# Altium PCB PCB.PcbDoc
Units mil, origin at the board's own origin, x right, y up, seen from the top; angles counter-clockwise.
Board outline 2756 x 1968.5 mil, 2 copper layers (Top Layer, Bottom Layer), stack 57 mil thick; 36 components, 28 nets, 111 pads, 258 vias.
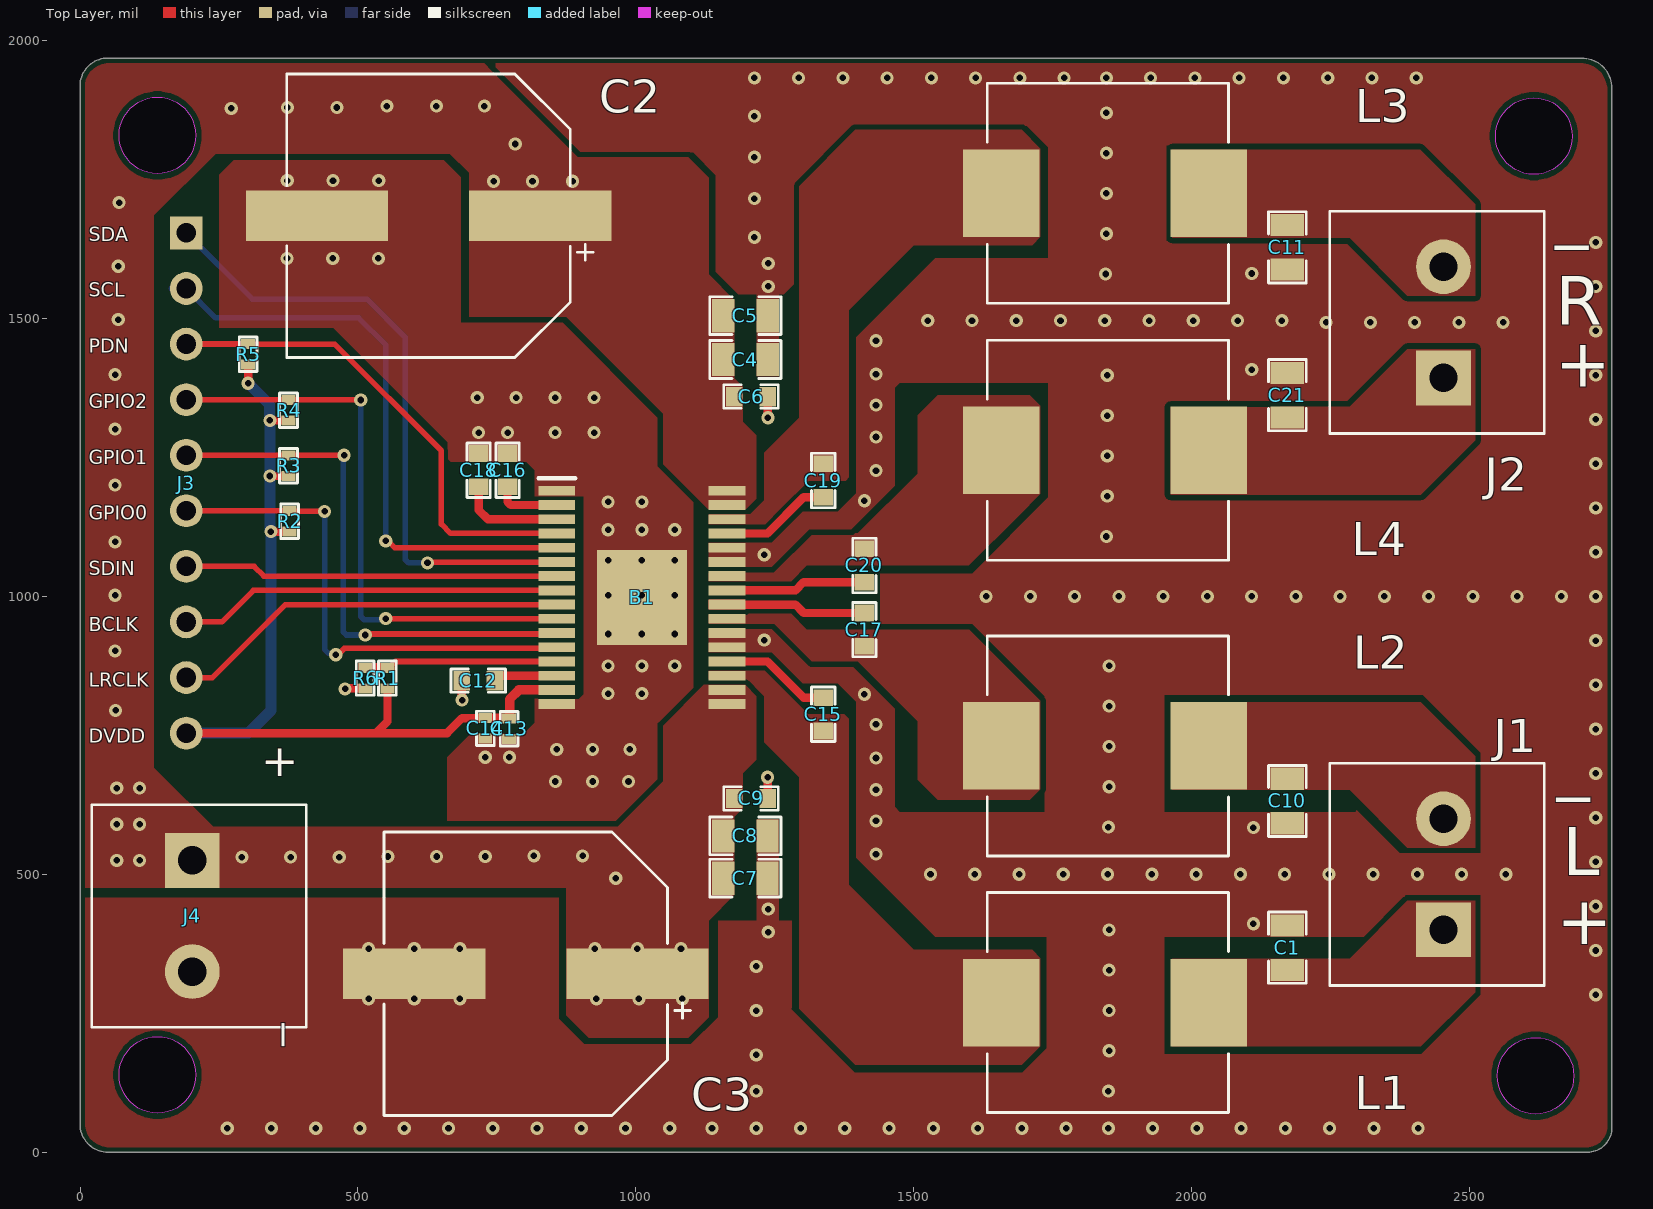
[diagram p0: Top Layer view]
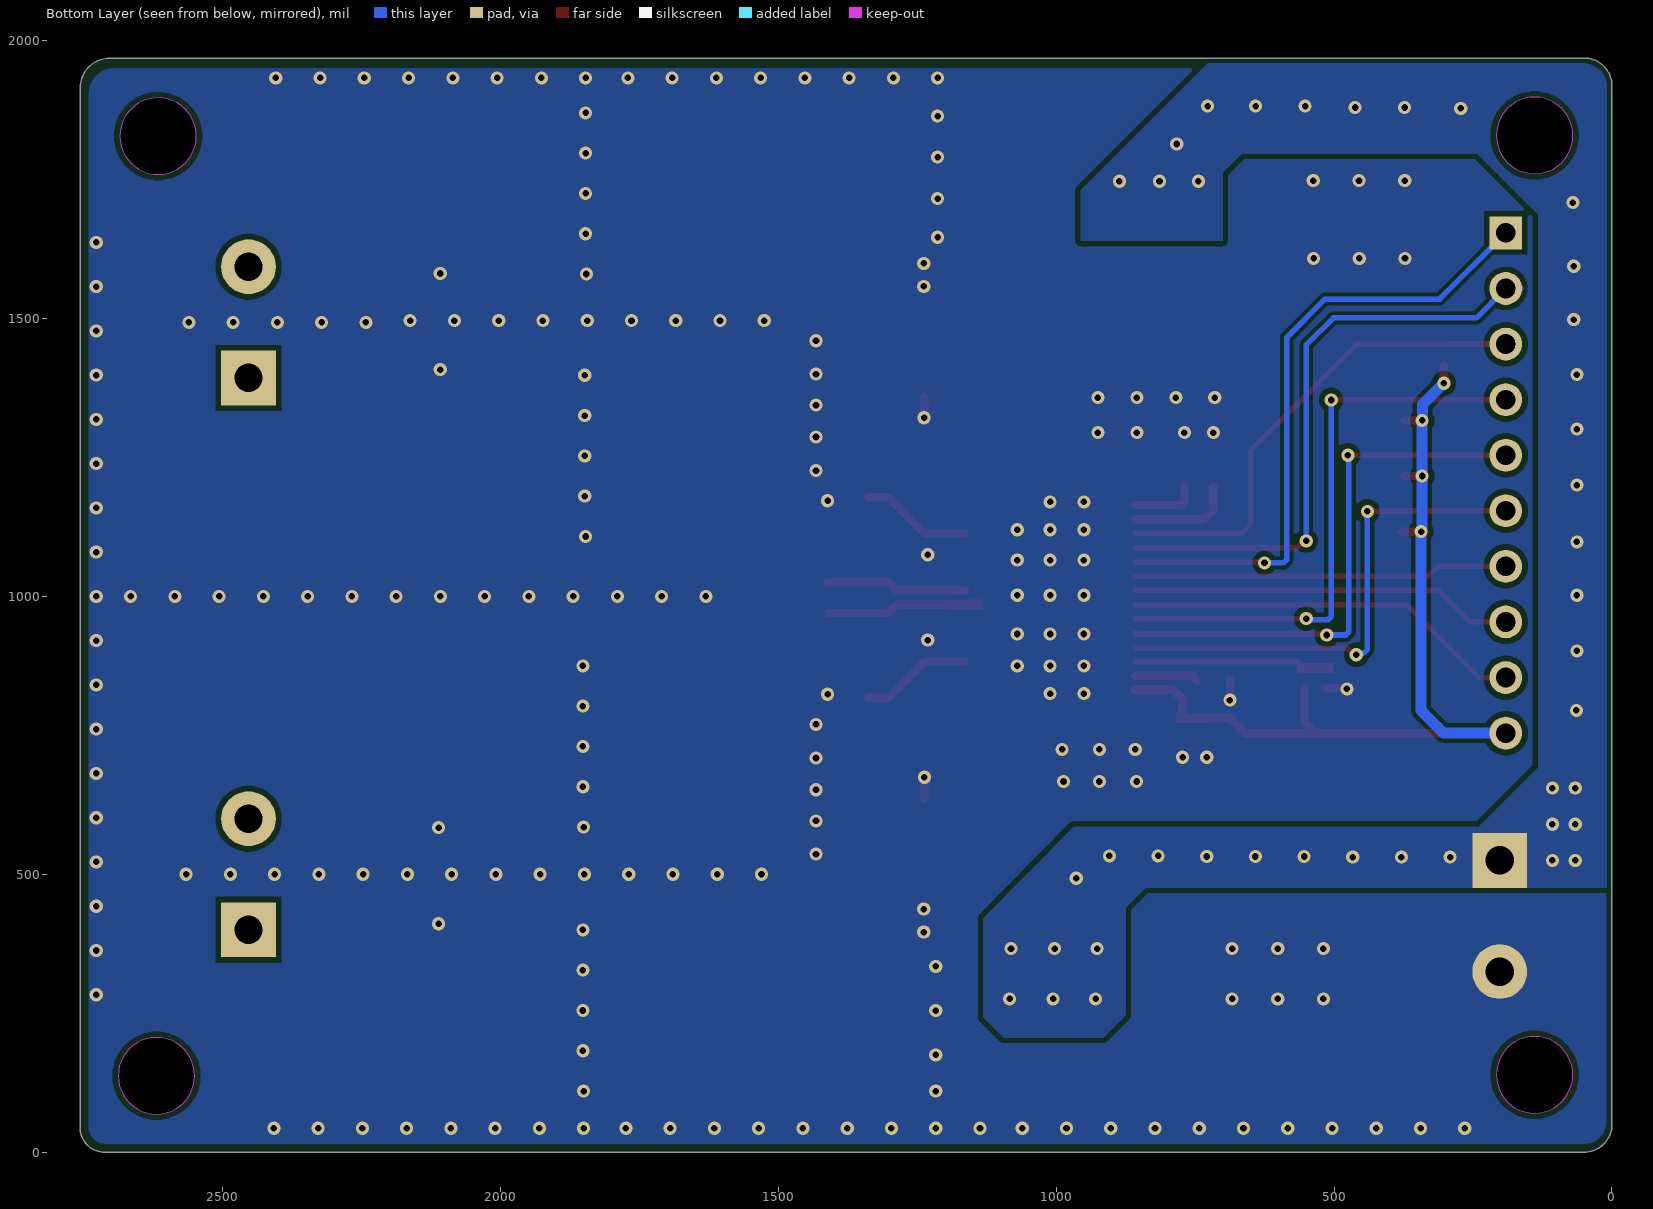
[diagram p1: Bottom Layer view, seen from below]
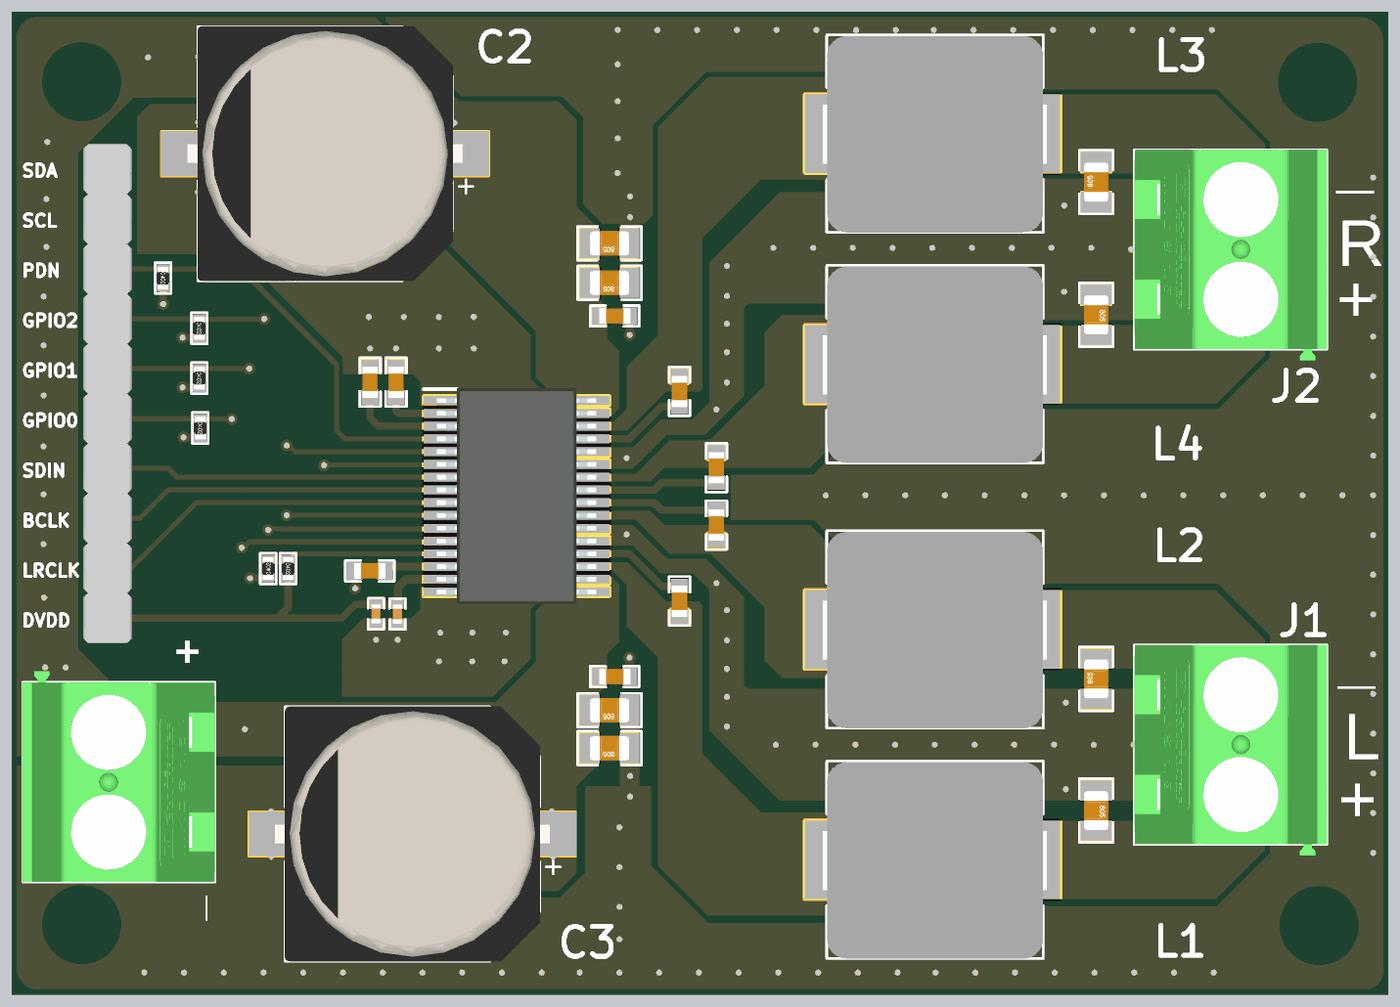
[diagram p2: 3D render of the assembled board from above, using the file's embedded part models]

## Layer stack, top to bottom
Top Solder: solder mask 3, Solder Resist, Dk 3.5
Top Layer: signal copper 10
Dielectric 1: core 37, FR-4, Dk 4.6
Bottom Layer: signal copper 10
Bottom Solder: solder mask 3, Solder Resist, Dk 3.5

## Board outline
50,0 cw(c50,50) 0,50 0,1918.5 cw(c50,1918.5) 50,1968.5 2702,1968.5 cw(c2702,1914.5) 2756,1914.5 2756,44 cw(c2712,44) 2712,0 2546,0
cut-out: 2546.73,1828.14 cw(c2615.63,1828.14) 2615.63,1897.03 cw(c2615.63,1828.14) 2684.53,1828.14 cw(c2615.63,1828.14) 2615.63,1759.24 cw(c2615.63,1828.14)
cut-out: 2549.66,137.44 cw(c2618.56,137.44) 2618.56,206.34 cw(c2618.56,137.44) 2687.46,137.44 cw(c2618.56,137.44) 2618.56,68.54 cw(c2618.56,137.44)
cut-out: 139.19,1760.41 cw(c139.19,1829.31) 70.3,1829.31 cw(c139.19,1829.31) 139.19,1898.21 cw(c139.19,1829.31) 208.09,1829.31 cw(c139.19,1829.31)
cut-out: 139.2,70.3 cw(c139.2,139.2) 70.3,139.2 cw(c139.2,139.2) 139.2,208.09 cw(c139.2,139.2) 208.09,139.2 cw(c139.2,139.2)

## Design rules (kind name [scope] priority, off if disabled: settings)
Clearance [All] p1: gap=10 ignorepadtopadclearanceinfootprint=FALSE except(5: Arc-SMDPad Arc-Text Arc-Hole Track-SMDPad Track-Text Track-Hole SMDPad-SMDPad SMDPad-Via SMDPad-Text SMDPad-Hole THPad-Text THPad-Hole Via-Text Fill-Text Poly-Text Region-Text Text-Text Text-Hole; 6: Arc-Arc Arc-Track Track-Track; 7: Arc-THPad Arc-Via Arc-Fill Arc-Poly Arc-Region Track-THPad Track-Via Track-Fill Track-Poly Track-Region SMDPad-Fill SMDPad-Poly SMDPad-Region)
HoleToHoleClearance [All] p1: gap=5 allowstackedmicrovias=TRUE
MinimumSolderMaskSliver [All] p1: minsoldermaskwidth=0
PlaneConnect [All] p1: planeconnectstyle=Direct reliefexpansion=20 reliefentries=4 reliefconductorwidth=10 reliefairgap=10
PolygonConnect [All] p1: connectstyle=Direct reliefconductorwidth=20 reliefentries=4 polygonreliefangle="90 Angle" airgapwidth=5
RoutingVias [All] p1: holewidth=11.81 width=23.62 viastyle="Through Hole" minholewidth=11.81 minwidth=23.62 maxholewidth=11.81 maxwidth=23.62
SilkToSilkClearance [All] p1: silktosilkclearance=0
SilkToSolderMaskClearance [IsPad] p1: minsilkscreentomaskgap=0 clearancetoexposedcopper=TRUE
SolderMaskExpansion [All] p1: expansion=4 istentingtop=FALSE
SupplyNets "Schematic Supply Nets_2" [InNet('DVDD')] p1: voltage=0.000
SupplyNets "Schematic Supply Nets_1" [InNet('PVDD')] p2: voltage=0.000
SupplyNets "Schematic Supply Nets" [InNet('GND')] p3: voltage=0.000
UnRoutedNet [All] p1: checkbadconnections=TRUE
Width [All] p1: maxlimit=50 minlimit=1 preferedwidth=10
24 further rules are at their usual default settings.

## Components (designator, comment, footprint, x,y, rotation, side; value= is the part's Value field where it differs from the comment)
B1 "TAS5828MDADR" SOP65P810X115-33M 1010.75,998.07 r0 top
C1 "680nF" Cap-0805 2172,368 r270 top
C2 "470uF" RVT470UF50V34RV0133 627,1685 r180 top
C3 "470uF" RVT470UF50V34RV0133 802,321 r180 top
C4 "10uF" Cap-0805 1197.01,1426.22 r180 top
C5 "10uF" Cap-0805 1197.01,1505.22 r180 top
C6 "100nF" Cap-0603 1207.23,1359.6 r180 top
C7 "10uF" Cap-0805 1197,493 r180 top
C8 "10uF" Cap-0805 1197,569 r180 top
C9 "100nF" Cap-0603 1207.23,636.42 r180 top
C10 "680nF" Cap-0805 2172,632 r90 top
C11 "680nF" Cap-0805 2172,1628 r90 top
C12 "1uF" Cap-0603 716.5,848.46 r0 top
C13 "0.1uF" Cap-0402 772,762 r90 top value=100nF
C14 "0.1uF" Cap-0402 729,762.5 r90 top value=100nF
C15 "0.47uF" Cap-0603 1337,787.83 r270 top
C16 "1uF" Cap-0603 769.09,1226.98 r270 top
C17 "0.47uF" Cap-0603 1411,940.22 r270 top
C18 "1uF" Cap-0603 717.09,1227 r270 top
C19 "0.47uF" Cap-0603 1337,1208.41 r90 top
C20 "0.47uF" Cap-0603 1411,1055.61 r90 top
C21 "680nF" Cap-0805 2172,1362 r270 top
J1 "1715721" 1715721 2453,500 r90 top
J2 "1715721" 1715721 2453,1493 r90 top
J3 "PZ254-1-10-Z-8.5" PZ254-1-10-Z-8.5 191,1654 r270 top
J4 "1715721" 1715721 202,425 r270 top
L1 "10uH" PSPMAA1040-100M-ANP 1843.98,269.22 r0 top
L2 "10uH" PSPMAA1040-100M-ANP 1843.98,731 r0 top
L3 "10uH" PSPMAA1040-100M-ANP 1843.98,1725.28 r0 top
L4 "10uH" PSPMAA1040-100M-ANP 1843.98,1263 r0 top
R1 "0R" Res-0402 553,853 r270 top
R2 "10K" Res-0402 377,1135 r270 top
R3 "10K" Res-0402 375,1235 r270 top
R4 "10K" Res-0402 375,1335 r270 top
R5 "10K" Res-0402 302.39,1435.64 r270 top
R6 "0R" Res-0402 513,853 r90 top

## Footprints (in the part's own frame and the unit in brackets; to place one, negate y for a bottom-side part, rotate by r counter-clockwise, add the part's x,y. Pads: shape width x height; smd on the part's side, far side on the other; paste and mask are expansions set on the pad)
1715721 [mm]
  rect 2.5x2.5 / inner round 2.5 / far side rect 2.5x2.5 hole 1.3: 1(-2.54,0)
  round 2.5 hole 1.3: 2(2.54,0)
  silkscreen extent -5.08,-4.6 5.08,5.2, body extent -5.64,-4.62 5.09,5.21, height 14.2
Cap-0402 [mil]
  rect 18x25 smd mask+2.36: 1(-18.5,0) 2(18.5,0)
  silkscreen extent -31,-16 31,16, body extent -20,-10 20,10, height 19
Cap-0603 [mil]
  rect 30x35 smd mask+2.36: 1(-30,0) 2(30,0)
  silkscreen extent -49,-21 49,21, body extent -32,-16 31,16, height 34
Cap-0805 [mil] "SMD 0805"
  rect 40x60 smd mask+2.76: 1(-40,0) 2(40,0)
  silkscreen extent -64,-34 64,34, body extent -39,-25 39,25, height 30
PSPMAA1040-100M-ANP [mm]
  rect 3.5x4 smd: 1(-4.75,0) 2(4.75,0)
  silkscreen extent -5.38,-5.03 5.64,5.03, body extent -5.57,-5.03 5.83,4.97, height 4
PZ254-1-10-Z-8.5 [mm]
  rect 1.5x1.5 hole 0.9: 1(0,0)
  round 1.5 hole 0.9: 2(2.54,0) 3(5.08,0) 4(7.62,0) 5(10.16,0) 6(12.7,0) 7(15.24,0) 8(17.78,0) 9(20.32,0) 10(22.86,0)
  body extent -1.27,-1.25 24.13,1.25, height 9.51
Res-0402 [mil]
  rect 18x25 smd mask+2.17: 1(-18.5,0) 2(18.5,0)
  silkscreen extent -32,-17 32,16, body extent -23,-11 23,11, height 16
RVT470UF50V34RV0133 [mm]
  rect 6.5x2.3 smd paste+0 mask+0.051: 1(-5.1,0) 2(5.1,0)
  silkscreen extent -7.52,-6.48 6.48,6.48, body extent -7,-6.5 7,6.5, height 13.5
SOP65P810X115-33M [mm]
  rect 1.675x0.45 smd: 1(-3.888,4.875) 2(-3.888,4.225) 3(-3.888,3.575) 4(-3.888,2.925) 5(-3.888,2.275) 6(-3.888,1.625) 7(-3.888,0.975) 8(-3.888,0.325) 9(-3.888,-0.325) 10(-3.888,-0.975) 11(-3.888,-1.625) 12(-3.888,-2.275) 13(-3.888,-2.925) 14(-3.888,-3.575) 15(-3.888,-4.225) 16(-3.888,-4.875) 17(3.888,-4.875) 18(3.888,-4.225) 19(3.888,-3.575) 20(3.888,-2.925) 21(3.888,-2.275) 22(3.888,-1.625) 23(3.888,-0.975) 24(3.888,-0.325) 25(3.888,0.325) 26(3.888,0.975) 27(3.888,1.625) 28(3.888,2.275) 29(3.888,2.925) 30(3.888,3.575) 31(3.888,4.225) 32(3.888,4.875)
  rect 4.11x4.36 smd: 33(0,0)
  silkscreen extent -4.72,5.45 -3.05,5.45, body extent -4.05,-5.5 4.05,5.5, height 1.15

## Part data
B1: "Audio Amplifiers 50-W stereo, digital input, high-performance, closed-loop, Class-D, with integrated audio processor 32-HTSSOP -40 to 85", LCSC Part Number=C5214953, Manufacturer_Name="Texas Instruments", Mouser Part Number=595-TAS5828MDADR, Datasheet Link=https://www.ti.com/lit/ds/symlink/tas5828m.pdf, Geometry.Height=1.15mm, Manufacturer_Part_Number=TAS5828MDADR, Mouser Price/Stock=https://www.mouser.co.uk/ProductDetail/Texas-Instruments/TAS5828MDADR?qs=doiCPypUmgHjYs2O7pGN6A%3D%3D
C1 C10 C11 C21: library part CC0805KKX7R9BB684, "50V 680nF X7R ±10% 0805 Multilayer Ceramic Capacitors MLCC - SMD/SMT ROHS", LCSC Part Number=C107133, Manufacturer=YAGEO, Package=0805, ComponentLink1Description="LCSC Link", ComponentLink1URL=https://www.lcsc.com/product-detail/Multilayer-Ceramic-Capacitors-MLCC-SMD-SMT_YAGEO-CC0805KKX7R9BB684_C107133.html, Item Type=Cap, Manufacturer Part Number=CC0805KKX7R9BB684
C2 C3: library part RVT470UF50V34RV0133, "470uF 50V 50mA@120Hz ±20% SMD,D12.5xL13.5mm Aluminum Electrolytic Capacitors - SMD ROHS", LCSC Part Number=C2837182, Manufacturer=KNSCHA, Item Type=Capacitor, Manufacturer Part Number=RVT470UF50V34RV0133, RoHS=No, Supplier=LCSC
C4 C5 C7 C8: library part GRM21BR61H106ME43L, "CAP CER 10UF 50V X5R 0805", LCSC Part Number=C2190942, Manufacturer=Murata, Supplier Part Number 1=490-18664-1-ND, Category="Ceramic Capacitors", Manufacturer Part Number=GRM21BR61H106ME43L, Pricing 1="1=0.44000, 10=0.30700, 50=0.21500, 100=0.18420, 500=0.13818, 1000=0.11668 (USD)", RoHS=Yes, Stock 1=26, Supplier 1=Digi-Key
C6 C9: library part CC0603KRX5R9BB104, "CAP CER 0.1UF 50V X5R 0603", Case Code (Imperial)=0603, Case Code (Metric)=1608, Dielectric=X5R, LCSC Part Number=C110022, Manufacturer=Yageo, Max Operating Temperature=85°C, Min Operating Temperature=-55°C, Package Quantity=4000, Supplier Part Number 1=311-4046-1-ND, Tolerance=10%, Voltage Rating=50V, Capacitance=100nF, Case/Package=0603, Category="Ceramic Capacitors", ComponentLink1Description=http://www.mouser.com/ds/2/447/Yageo_UPY-GP_NP0_16V-to-50V_9-358835.pdf?src-supplier=Mouser, ComponentLink1URL=http://www.mouser.com/ds/2/447/Yageo_UPY-GP_NP0_16V-to-50V_9-358835.pdf?src-supplier=Mouser, ComponentLink2Description=https://www.yageo.com/upload/media/product/productsearch/datasheet/mlcc/UPY-GPHC_X5R_4V-to-50V_26.pdf?src-supplier=Digi-Key, ComponentLink2URL=https://www.yageo.com/upload/media/product/productsearch/datasheet/mlcc/UPY-GPHC_X5R_4V-to-50V_26.pdf?src-supplier=Digi-Key, ComponentLink3Description=http://www.yageo.com/exep/pages/download/literatures/ProductSelectionGuide%202014_Final_2.pdf?src-supplier=Digi-Key, ComponentLink3URL=http://www.yageo.com/exep/pages/download/literatures/ProductSelectionGuide%202014_Final_2.pdf?src-supplier=Digi-Key, Halogen Free="Halogen Free", Item Type=Capacitor, Lead Free="Lead Free", Length=0.063inch, Manufacturer Part Number=CC0603KRX5R9BB104, Mount="Surface Mount", Packaging="Tape and Reel", Pricing 1="1=0.10000, 10=0.05200, 50=0.02820, 100=0.02310, 500=0.01648, 1000=0.01294 (USD)", RoHS=Yes, Stock 1=152253, Supplier 1=Digi-Key, Termination=SMD/SMT, Thickness=0.035inch, Voltage Rating (DC)=50V, Weight=7.1E-05oz, Width=0.031inch
C12 C16 C18: library part CC0603KRX5R8BB105, "CAP CER 1UF 25V X5R 0603", Case Code (Imperial)=0603, Case Code (Metric)=1608, Dielectric=X5R, LCSC Part Number=C14664, Manufacturer=Yageo, Max Operating Temperature=85°C, Min Operating Temperature=-55°C, Package Quantity=1, Supplier Part Number 1=311-1445-1-ND, Tolerance=10%, Voltage Rating=25V, Capacitance=1uF, Case/Package=0603, Category="Ceramic Capacitors", ComponentLink1Description=https://datasheet.ciiva.com/176/mlccorderingcode-176785.pdf?src-supplier=Digi-Key, ComponentLink1URL=https://datasheet.ciiva.com/176/mlccorderingcode-176785.pdf?src-supplier=Digi-Key, ComponentLink2Description=https://datasheet.ciiva.com/176/mlccorderingcode-176786.pdf?src-supplier=Digi-Key, ComponentLink2URL=https://datasheet.ciiva.com/176/mlccorderingcode-176786.pdf?src-supplier=Digi-Key, ComponentLink3Description=https://datasheet.ciiva.com/176/mlccorderingcode-176787.pdf?src-supplier=Digi-Key, ComponentLink3URL=https://datasheet.ciiva.com/176/mlccorderingcode-176787.pdf?src-supplier=Digi-Key, ComponentLink4Description=https://datasheet.ciiva.com/17436/upy-gphc-x5r-4v-to-50v-12-17436952.pdf?src-supplier=Avnet+Europe, ComponentLink4URL=https://datasheet.ciiva.com/17436/upy-gphc-x5r-4v-to-50v-12-17436952.pdf?src-supplier=Avnet+Europe, ComponentLink5Description=https://datasheet.ciiva.com/7978/1525783-7978171.pdf?src-supplier=Element14, ComponentLink5URL=https://datasheet.ciiva.com/7978/1525783-7978171.pdf?src-supplier=Element14, ComponentLink6Description=https://datasheet.ciiva.com/11586/upy-gphc-x5r-4v-to-50v-12-11586318.pdf?src-supplier=Avnet, ComponentLink6URL=https://datasheet.ciiva.com/11586/upy-gphc-x5r-4v-to-50v-12-11586318.pdf?src-supplier=Avnet, Construction=Flat, Depth=0.8mm, Halogen Free="Halogen Free", Height=0.8mm, Item Type=Capacitor, Lead Free="Lead Free", Length=1.6mm, Manufacturer Part Number=CC0603KRX5R8BB105, Mount="Surface Mount", Number of Pins=2, Packaging="Tape and Reel", Pricing 1="1=0.12000, 10=0.08400, 50=0.04760, 100=0.03940, 500=0.02764, 1000=0.02288 (USD)", Radiation Hardening=No, REACH SVHC="No SVHC", RoHS=Yes, RoHS Compliant=Yes, Series=CC, Stock 1=919939, Supplier 1=Digi-Key, Termination=SMD/SMT, Thickness=0.035inch, Voltage Rating (DC)=25V, Width=0.031inch
C13 C14: library part CC0402JRX7R7BB104, "CAP CER 0.1UF 16V X7R 0402", Case Code (Imperial)=0402, Case Code (Metric)=1005, Dielectric=X7R, LCSC Part Number=C541464, Manufacturer=Yageo, Max Operating Temperature=125°C, Min Operating Temperature=-55°C, Package Quantity=10000, Supplier Part Number=311-1676-1-ND, Tolerance=5%, Voltage Rating=16V, Case/Package=0402, Category="Ceramic Capacitors", ComponentLink1Description=https://datasheet.ciiva.com/13210/upy-gphc-x7r-6-3v-to-50v-8-12304-13210152.pdf?src-supplier=Mouser, ComponentLink1URL=https://datasheet.ciiva.com/13210/upy-gphc-x7r-6-3v-to-50v-8-12304-13210152.pdf?src-supplier=Mouser, Construction=Flat, Halogen Free="Halogen Free", Height=0.5mm, Item Type=Capacitor, Lead Free="Lead Free", Length=0.039inch, Manufacturer Part Number=CC0402JRX7R7BB104, Material=4241ConductorMaterial, Mounting Technology="Surface Mount", Packaging="Tape and Reel", Pricing="1=0.1, 10=0.046, 50=0.0262, 100=0.0203, 500=0.01528, 1000=0.012, 2500=0.01091, 5000=0.01004 (USD)", RoHS=Yes, RoHS Compliant=Yes, Series=CC, Stock=1659111, Supplier=Digikey, Thickness=0.022inch, Voltage Rating (DC)=16V, Width=0.02inch
C15 C17 C19 C20: library part CC0603KRX5R9BB474, "CAP CER 0.47UF 50V X5R 0603", Capacitance=470nF, Case/Package=0603, Dielectric=X5R, LCSC Part Number=C513651, Manufacturer=Yageo, Max Operating Temperature=85°C, Min Operating Temperature=-55°C, Supplier Part Number 1=311-4047-1-ND, Tolerance=10%, Voltage Rating=50V, Category="Ceramic Capacitors", ComponentLink1Description="https://www.mouser.com/ds/2/447/ProductSelectionGuide 2014_Final_2-1131690.pdf?src-supplier=Mouser", ComponentLink1URL="https://www.mouser.com/ds/2/447/ProductSelectionGuide 2014_Final_2-1131690.pdf?src-supplier=Mouser", ComponentLink2Description=http://www.yageo.com/documents/recent/UPY-GPHC_X5R_4V-to-50V_25.pdf?src-supplier=Digi-Key, ComponentLink2URL=http://www.yageo.com/documents/recent/UPY-GPHC_X5R_4V-to-50V_25.pdf?src-supplier=Digi-Key, ComponentLink3Description=http://www.yageo.com/exep/pages/download/literatures/ProductSelectionGuide%202014_Final_2.pdf?src-supplier=Digi-Key, ComponentLink3URL=http://www.yageo.com/exep/pages/download/literatures/ProductSelectionGuide%202014_Final_2.pdf?src-supplier=Digi-Key, Halogen Free="Halogen Free", Item Type=Capacitor, Lead Free="Lead Free", Length=0.063inch, Manufacturer Part Number=CC0603KRX5R9BB474, Mount="Surface Mount", Packaging="Tape and Reel", Pricing 1="1=0.45000, 10=0.31400, 50=0.22000, 100=0.18860, 500=0.14144, 1000=0.11944 (USD)", RoHS=Yes, RoHS Compliant=Yes, Stock 1=15145, Supplier 1=Digi-Key, Thickness=0.035inch, Voltage Rating (DC)=50V, Width=0.031inch
J1 J2 J4: "TERM BLK 2P SIDE ENT 5.08MM PCB", LCSC Part Number=C480516, Manufacturer="Phoenix Contact", Supplier Part Number=277-1263-ND, ComponentLink1Description=https://datasheet.ciiva.com/1120/1697161-1120393.pdf?src-supplier=Farnell, ComponentLink1URL=https://datasheet.ciiva.com/1120/1697161-1120393.pdf?src-supplier=Farnell, ComponentLink2Description=https://datasheet.ciiva.com/832/1715721-832095.pdf?src-supplier=Digikey, ComponentLink2URL=https://datasheet.ciiva.com/832/1715721-832095.pdf?src-supplier=Digikey, ComponentLink3Description=https://datasheet.ciiva.com/15169/getdatasheetpartid-212174-15169929.pdf?src-supplier=Verical, ComponentLink3URL=https://datasheet.ciiva.com/15169/getdatasheetpartid-212174-15169929.pdf?src-supplier=Verical, ComponentLink4Description=https://datasheet.ciiva.com/16046/1715721-16046034.pdf?src-supplier=Onlinecomponents.com, ComponentLink4URL=https://datasheet.ciiva.com/16046/1715721-16046034.pdf?src-supplier=Onlinecomponents.com, Item Type="Terminal Blocks", Manufacturer Part Number=1715721, Pricing="1=0.94 (USD)", RoHS=Yes, Stock=13160, Supplier=Digikey
J3: "3A Direct Insert Policy 2.5mm 260℃@10S 10P 6mm -40℃~+105℃ 3mm 2.54mm Single Row Black Brass 1x10P Plugin,P=2.54mm Pin Headers ROHS", LCSC Part Number=C2894933, Manufacturer=HCTL, Package=Plugin,P=2.54mmPlugin,P=2.54mm, ComponentLink1Description="LCSC Link", ComponentLink1URL=https://www.lcsc.com/product-detail/Pin-Headers_HCTL-PZ254-1-10-Z-8-5_C2894933.html, Item Type=Header, Manufacturer Part Number=PZ254-1-10-Z-8.5
L1 L2 L3 L4: library part PSPMAA1040-100M-ANP, "7A 10uH ±20% 10A SMD,10.3x10.5mm Power Inductors ROHS", LCSC Part Number=C2983105, Manufacturer="PROD Tech", Package=SMD,10.3x10.5mm, ComponentLink1Description=LCSC, ComponentLink1URL=https://www.lcsc.com/product-detail/Power-Inductors_PROD-Tech-PSPMAA1040-100M-ANP_C2983105.html, Item Type=Inductor, Manufacturer Part Number=PSPMAA1040-100M-ANP
R1 R6: library part RC0402FR-070RL, "RES 0 OHM JUMPER 1/16W 0402", Case Code (Imperial)=0402, Case Code (Metric)=1005, LCSC Part Number=C106231, Manufacturer=Yageo, Max Operating Temperature=155°C, Max Power Dissipation=63mW, Min Operating Temperature=-55°C, Power Rating=62.5mW, Resistor Type="Thick Film", Supplier Part Number 1=603-RC0402FR-070RL, Temperature Coefficient=200ppm/°C, Tolerance=1%, Voltage Rating=50V, Case/Package=0402, ComponentLink1Description=https://datasheet.ciiva.com/8896/pyu-rc0402-51-rohs-l-6-8896149.pdf?src-supplier=Avnet, ComponentLink1URL=https://datasheet.ciiva.com/8896/pyu-rc0402-51-rohs-l-6-8896149.pdf?src-supplier=Avnet, ComponentLink2Description=https://datasheet.ciiva.com/16790/pyu-rc0402-51-rohs-l-6-r-16790444.pdf?src-supplier=Future+Electronics, ComponentLink2URL=https://datasheet.ciiva.com/16790/pyu-rc0402-51-rohs-l-6-r-16790444.pdf?src-supplier=Future+Electronics, Contact Plating=Tin,Matte, Features="Moisture Resistant", Height=0.35mm, Item Type=Resistors, Lead Free="Lead Free", Length=1mm, Manufacturer Part Number=RC0402FR-070RL, Mount="Surface Mount", Number of Terminations=2, Packaging="Tape and Reel", Pricing 1="1=0.10000, 10=0.01400, 50=0.01400, 100=0.00600, 1000=0.00300, 5000=0.00200, 10000=0.00100 (USD)", Radiation Hardening=No, Resistance=0R, RoHS=Yes, RoHS Compliant=Yes, Series=RC, Size Code=0402, Stock 1=8556842, Supplier 1=Mouser, Termination=SMD/SMT, Width=0.5mm
R2 R3 R4 R5: library part RC0402FR-0710KL, "RES 10K OHM 1% 1/16W 0402", Case Code (Imperial)=0402, Case Code (Metric)=1005, LCSC Part Number=C60490, Manufacturer=Yageo, Max Operating Temperature=155°C, Max Power Dissipation=63mW, Min Operating Temperature=-55°C, Power Rating=62.5mW, Resistance=10kR, Resistance Tolerance=1%, Resistor Type="Thick Film", Supplier Part Number 1=603-RC0402FR-0710KL, Temperature Coefficient=100ppm/°C, Voltage Rating=50V, Case/Package=0402, Category="Chip SMD Resistors", ComponentLink1Description=https://datasheet.ciiva.com/7660/38568-7660787.pdf?src-supplier=Element14, ComponentLink1URL=https://datasheet.ciiva.com/7660/38568-7660787.pdf?src-supplier=Element14, ComponentLink2Description=https://datasheet.ciiva.com/7849/1686128-7849814.pdf?src-supplier=Element14, ComponentLink2URL=https://datasheet.ciiva.com/7849/1686128-7849814.pdf?src-supplier=Element14, ComponentLink3Description=https://datasheet.ciiva.com/7983/1018594-7983486.pdf?src-supplier=Element14, ComponentLink3URL=https://datasheet.ciiva.com/7983/1018594-7983486.pdf?src-supplier=Element14, ComponentLink4Description=https://datasheet.ciiva.com/22747/1018594-22747512.pdf?src-supplier=Element14, ComponentLink4URL=https://datasheet.ciiva.com/22747/1018594-22747512.pdf?src-supplier=Element14, ComponentLink5Description=https://datasheet.ciiva.com/12667/pyu-rc0402-51-rohs-l-6-r-12667067.pdf?src-supplier=Mouser, ComponentLink5URL=https://datasheet.ciiva.com/12667/pyu-rc0402-51-rohs-l-6-r-12667067.pdf?src-supplier=Mouser, ComponentLink6Description=https://datasheet.ciiva.com/7849/1784430-7849813.pdf?src-supplier=Element14, ComponentLink6URL=https://datasheet.ciiva.com/7849/1784430-7849813.pdf?src-supplier=Element14, ComponentLink7Description=https://datasheet.ciiva.com/7849/1784430-7849815.pdf?src-supplier=Element14, ComponentLink7URL=https://datasheet.ciiva.com/7849/1784430-7849815.pdf?src-supplier=Element14, Construction=Rectangular, Depth=0.5mm, Features="Moisture Resistant", Height=0.32mm, Item Type=Resistor, Lead Free="Lead Free", Lead Pitch=0.2mm, Length=1mm, Manufacturer Part Number=RC0402FR-0710KL, Military Standard=Not, Number of Pins=2, Number of Terminations=2, Packaging="Tape and Reel", Pricing 1="1=0.10000, 10=0.01400, 50=0.01400, 100=0.00500, 1000=0.00300, 10000=0.00200 (USD)", REACH SVHC="No SVHC", RoHS=Yes, RoHS Compliant=Yes, Series=RC, Stock 1=18648329, Supplier 1=Mouser, Termination=SMD/SMT, Tolerance=1%, Voltage Rating (DC)=50V, Width=0.5mm, Working Voltage=50V

## Via types
v1: diameter 23.62, hole 11.81, Top Layer to Bottom Layer, 258 vias

## Nets (pads, with @x,y where several pads share a name; then routed paths per layer and width w, separated by ;. In a path a pad name is that pad's centre, name@x,y a point inside that pad or via, vN(x,y) a via of type N, cw(c..) or ccw(c..) an arc to the next point about the centre after c; other vN are vias at no path point)
ADR: B1.13 R1.1 R6.2 | length 309.4
  Top Layer w10: R1.1 556.5,871.5 567.91,882.91 B1.13
BCLK: B1.8 J3.8 | length 690.2
  Top Layer w10: J3.8 255,954 311.87,1010.87 B1.8
BST_A+: B1.20 C15.1 | length 200.2
  Top Layer w15: B1.20 1236.66,882.91 1301.84,817.73 C15.1@1337,817.73
BST_A-: B1.24 C17.1 | length 253.4
  Top Layer w15: B1.24 1286.94,985.28 1302,970.22 C17.1
BST_B+: B1.29 C19.1 | length 200.2
  Top Layer w15: B1.29 1236.66,1113.23 1301.84,1178.41 C19.1
BST_B-: B1.25 C20.1 | length 253.3
  Top Layer w15: B1.25 1287.1,1010.87 1301.84,1025.61 C20.1
DVDD: B1.15 C13.2 C14.2 J3.10 R1.2 R2.2 R3.2 R4.2 R5.2 | length 1674.6
  Top Layer w15: J3.10 532,754 ; v1@302.35,1383.56 R5.2 ; v1@341.42,1216.54 R3.2 ; v1@341.42,1316.54 R4.2 ; v1@343.42,1116.54 R2.2 ; R1.2 553,775 532,754 ; C14.2 687.49,781 660.49,754 532,754
  Top Layer w17: C13.2 772.32,780.5 772.82,781 772.82,815 789.55,831.73 B1.15
  Bottom Layer w20: J3.10 303,754 343.38,794.38 v1(343.38,1116.57) 343.38,1117.55 341.38,1119.55 v1(341.38,1216.57) v1(341.38,1316.57) 340.69,1317.26 340.69,1345.15 v1(302.32,1383.53)
GND: B1.1 B1.16 B1.21 B1.22 B1.27 B1.28 B1.33 C1.1 C2.2 C3.2 C4.1 C5.1 C6.1 C7.1 C8.1 C9.1 C10.1 C11.1 C12.1 C13.1 C14.1 C16.1 C18.1 C21.1 J4.2 R6.1 | length 147.2
  Top Layer w15: v1@477.63,834.5 R6.1 ; v1@686.51,814.27 C12.1@686.51,849.64 ; v1(1237,674.57) 1237.12,674.46 1237.12,636.54 C9.1 ; C6.1 1237.35,1359.48 1237.35,1321.57 v1(1237.46,1321.45)
  other v1: 264.65,43 344.28,43 423.91,43 503.54,43 583.17,43 662.8,43 742.43,43 822.06,43 901.69,43 981.32,43 1060.96,43 1136.96,43 1216.59,43 1296.22,43 1375.85,43 1455.48,43 1535.11,43 1614.74,43 1694.37,43 1774,43 1850,43 1929.63,43 2009.26,43 2088.89,43 2168.52,43 2248.15,43 2327.78,43 2407.41,43 1216.59,110 1850,110 1216.59,175 1851.48,182.5 1216.59,254.63 1851.48,255 519,275.72 601.22,275.72 683.44,275.72 2727,283.32 1851.48,327.5 1216.59,334.26 2727,362.96 519,366.28 601.22,366.28 683.44,366.28 1238,396 1851.48,400 2111,411 1238,437.5 2727,442.59 1530.07,500 1609.7,500 1689.33,500 1768.96,500 1848.59,500 1928.22,500 2007.85,500 2087.49,500 2167.12,500 2246.75,500 2326.38,500 2406.01,500 2485.64,500 2565.27,500 2727,522.22 1432,536.29 2111,584 1850,585 1432,596.14 2727,601.85 1432,652.07 1851.48,657.5 855.13,667 922.18,667 986.68,667 2727,681.48 1432,709.3 729,710.49 772.32,710.49 857.68,724.75 922.18,724.75 989.22,724.75 1851.48,730 2727,761.11 1432,769.73 1851.48,802.5 687.32,813.46 1411,824 950,825 1010.75,825 476.82,833.68 2727,840.74 950,875 1010.75,875 1070,875 1851.48,875 2727,920.37 1231,921.3 950,932.33 1010.75,932.33 1070,932.33 1630,1000 1709.63,1000 1789.26,1000 1868.89,1000 1948.52,1000 2028.15,1000 2107.78,1000 2187.41,1000 2267.04,1000 2346.68,1000 2426.31,1000 2505.94,1000 2585.57,1000 2665.2,1000 2727,1000 950,1002.01 1010.75,1002.01 1070,1002.01 950,1065.21 1010.75,1065.21 1070,1065.21 1231,1074.84 2727,1079.63 1846.48,1107.8 950,1120 1010.75,1120 1070,1120 2727,1159.26 950,1170 1010.75,1170 1411,1172.14 1847.97,1180.3 1432,1226.41 2727,1238.89 1847.97,1252.8 1432,1286.84 717.09,1294.67 769.09,1294.67 854.65,1294.67 924.72,1294.67 2727,1318.52 1847.97,1325.3 1432,1344.07 714.5,1357.73 784.57,1357.73 854.65,1357.73 924.72,1357.73 1847.97,1397.8 2727,1398.15 1432,1400 2108,1408 1432,1459.85 2727,1477.78 2241.75,1493 2321.38,1493 2401.01,1493 2480.64,1493 2560.27,1493 1525.07,1496.14 1604.7,1496.14 1684.33,1496.14 1763.96,1496.14 1843.59,1496.14 1923.22,1496.14 2002.85,1496.14 2082.49,1496.14 2162.12,1496.14 2727,1557.41 1238.01,1557.72 1845,1580 2108,1581 1238.01,1599.22 372.28,1608 454.5,1608 536.72,1608 2727,1637.04 1213.07,1646.11 1846.48,1652.5 1213.07,1715.74 1846.48,1725 372.78,1748 455,1748 537.22,1748 1213.07,1790.37 1846.48,1797.5 1213.07,1864 1846.48,1870 1213.07,1933 1292.7,1933 1372.33,1933 1451.96,1933 1531.59,1933 1611.22,1933 1690.85,1933 1770.48,1933 1846.48,1933 1926.11,1933 2005.75,1933 2085.38,1933 2165.01,1933 2244.64,1933 2324.27,1933 2403.9,1933
GPIO0: B1.12 J3.6 R2.1 | length 922
  Top Layer w10: J3.6 191.25,1153.75 376.75,1153.75 R2.1 377.25,1153.25 439.75,1153.25 v1(440,1153) ; v1(460,895) 463.69,895 475.44,906.75 855.93,906.75 B1.12
  Bottom Layer w10: v1@440,1150 440,904.63 447.03,897.61 457.39,897.61 v1(460,895)
GPIO1: B1.11 J3.5 R3.1 | length 987.1
  Top Layer w10: J3.5 191.25,1253.75 374.75,1253.75 R3.1 375.25,1253.75 474.75,1253.75 v1(475,1254) ; v1(513,930.56) 514.77,932.33 855.91,932.33 B1.11
  Bottom Layer w10: v1@475,1250 473.19,1248.19 473.19,936.42 479.05,930.56 v1(513,930.56)
GPIO2: B1.10 J3.4 R4.1 | length 1059.8
  Top Layer w10: J3.4 191.25,1353.75 374.75,1353.75 R4.1 375.05,1353.45 504.95,1353.45 v1(505,1353.39) ; v1(550,960) 550.16,959.84 857.52,959.84 B1.10
  Bottom Layer w10: v1(505,1353.39) 505,963.9 510.86,958.04 548.04,958.04 v1(550,960)
LRCLK: B1.9 J3.9 | length 721.1
  Top Layer w10: J3.9 238.06,854 369.33,985.28 B1.9
NetB1_2: B1.2 C16.2 | length 117.9
  Top Layer w15: C16.2 769.09,1170 774.68,1164.41 B1.2
NetB1_3: B1.3 C18.2 | length 189
  Top Layer w15: C18.2 717.09,1155.55 733.82,1138.82 B1.3
NetB1_14: B1.14 C12.2 | length 115.6
  Top Layer w15: C12.2 746.5,849.82 754,857.32 B1.14
NetC1_2: C1.2 J1.1 L1.2
NetC10_2: C10.2 J1.2 L2.2
NetC11_2: C11.2 J2.2 L3.2
NetC21_2: C21.2 J2.1 L4.2
OUT_A+: B1.19 C15.2 L1.1
OUT_A-: B1.23 C17.2 L2.1
OUT_B+: B1.30 C19.2 L3.1
OUT_B-: B1.26 C20.2 L4.1
PDN: B1.4 J3.3 R5.1 | length 885.3
  Top Layer w10: J3.3 191.07,1454.07 302.32,1454.07 R5.1 303.03,1453.5 458.5,1453.5 650,1262 650,1129.96 666.73,1113.23 B1.4
PVDD: B1.17 B1.18 B1.31 B1.32 C2.1 C3.1 C4.2 C5.2 C6.2 C7.2 C8.2 C9.2 J4.1
  other v1: 928.88,275.72 1005.34,275.72 1083.73,275.72 926.32,366.28 1002.78,366.28 1081.17,366.28 963.78,493 66,525.1 107,525.1 291.1,531 378.68,531 466.26,531 553.84,532 641.42,532 729,532 816.58,533 904.16,533 66,590.05 107,590.05 66,655 107,655 64,795 63,902 63,1002 63,1098 63,1200.17 63,1301 63,1399 68.72,1498 68.72,1594 70.3,1708.55 744,1747 814,1747 886,1747 783,1814 272,1878.03 373,1879.6 462,1879.6 552,1882 641,1882 727.3,1882
SCL: B1.5 J3.2 | length 1093
  Top Layer w10: v1(550,1100) 553.69,1100 566.05,1087.64 B1.5
  Bottom Layer w10: J3.2@164,1554 J3.2 244,1501 501,1501 550,1452 v1(550,1100)
SDA: B1.6 J3.1 | length 1147.6
  Top Layer w10: v1(625,1060.27) 625.89,1061.16 856.79,1061.16 B1.6
  Bottom Layer w10: J3.1 310,1535 516,1535 585,1466 585,1066.13 590.86,1060.27 v1(625,1060.27)
SDIN: B1.7 J3.7 | length 673.9
  Top Layer w10: J3.7 313,1054 330.54,1036.46 B1.7

## Polygon pours and split planes (outlines as drawn)
GND on Bottom Layer "NONET_L-01_P-001" (solid, pour order 34): 48.55,1949.97 cw(c48.58,1949.97) 48.58,1950 2695,1950 cw(c2695,1905) 2740,1905 2740,45 cw(c2710,45) 2710,15 50,15 cw(c50,55) 10,55 10,1910 cw(c50,1910)
PVDD on Bottom Layer "NONET_L-01_P-001" (solid, pour order 38): 251.3,475.99 9.3,475.99 9.3,1916.99 cw(c51.3,1916.99) 51.3,1958.99 727.3,1958.99 956.03,1730.27 956.03,1639.72 700.12,1639.72 700.12,1762.16 665.62,1796.67 242.38,1796.67 132.7,1686.99 132.7,691.79 251.3,574.2
PVDD on Bottom Layer "NONET_L-01_P-001" (solid, pour order 44): 212,585.1 212,475.99 839.01,475.99 875,440 875,246 915,206 1094,206 1131,243 1131,421 968,586
PVDD on Top Layer "NONET_L-01_P-001" (solid, pour order 37): 251,476 9,476 9,1917 cw(c51,1917) 51,1959 727.01,1959 955.73,1730.28 955.73,1503.2 699.83,1503.2 699.83,1762.17 665.33,1796.67 243.67,1796.67 132.41,1685.41 132.41,691.8 251,574.21
PVDD on Top Layer "NONET_L-01_P-001" (solid, pour order 39): 1192.23,682.14 1192.23,618.92 1177,603.69 1177,463 1130.73,416.73 1130.73,242.73 1094,206 915,206 874.83,246.17 874.83,492.83 1049,667 1049,682.14
GND on Top Layer "NONET_L-01_P-001" (solid, pour order 49): 250,1483.53 455.25,1483.53 661.3,1277.48 661.3,1247.41 666.73,1241.98 802.7,1241.98 817.7,1226.98 817.7,1180.27 906,1180.27 906,824.22 896.78,815 824.7,815 823.83,815.87 817.7,815.87 817.7,772.7 798,753 703,753 660.49,710.49 660.49,596 963.58,596 1038.8,671.22 1038.8,771.59 1103,835.78 1103,1169.53 1038.8,1233.72 1038.8,1321.2 868,1492 685,1492 685,1754 654,1785 276.41,1785 250,1758.59
GND on Top Layer "NONET_L-01_P-001" (solid, pour order 47): 9,458 9,52 ccw(c52,52) 52,9 2710.41,9 ccw(c2710.41,45.77) 2747.18,45.77 2747.18,1911.53 ccw(c2699.48,1911.53) 2699.48,1959.23 748,1959.23 748,1949 898,1799 1103,1799 1144.08,1757.92 1144.08,1584.11 1184.19,1544 1266,1544 1285,1563 1285,1742 1390,1847 1703,1847 1742,1808 1742,1178 1605,1041 1440,1041 1440,950.57 1605.43,950.57 1736,820 1736,568 1951,568 1951,823 2416,823 2520,719 2520,538 2374,538 2297,615 2294,612 2202,612 2202,388 2310,388 2385,463 2520,463 2520,283.16 2412.84,176 1951,176 1951,429 1739,429 1739,187 1695,143 1393,143 1393,143.83 1279,257.83 1280,258.83 1280,416.73 1148,416.73 1148,243 1099,194 907,194 861,240 861,458 31,458
OUT_B- on Top Layer "NONET_L-01_P-001" (solid, pour order 20): 1130.85,1045.32 1130.85,1027.6 1279.47,1027.6 1307.49,1055.61 1599.23,1055.61 1688.62,1145 1727.88,1184.26 1727.88,1343.12 1708.86,1362.14 1543.14,1362.14 1507,1326 1507,1221.05 1399.18,1113.23 1316.71,1113.23 1248.79,1045.32
PVDD on Top Layer "NONET_L-01_P-001" (solid, pour order 42): 1192.23,1313.88 1192.23,1377.1 1177,1392.33 1177,1533.02 1130.73,1579.29 1130.73,1753.29 1094,1790.02 874.83,1790.02 874.83,1503.2 1049,1329.02 1049,1313.88
GND on Top Layer "NONET_L-01_P-001" (solid, pour order 43): 1217.01,1396.22 1217.01,1615.22 1257.01,1615.22 1257.01,1532.22 1257.01,1396.22
PVDD on Top Layer "NONET_L-01_P-001" (solid, pour order 41): 1196.4,1155.43 1216.46,1175.49 1216.46,1289.57 1192.14,1313.88 1049,1313.88 1049,1237.63 1131.2,1155.43
GND on Top Layer "NONET_L-01_P-001" (solid, pour order 40): 1217,599 1217,380 1257,380 1257,463 1257,599
PVDD on Top Layer "NONET_L-01_P-001" (solid, pour order 2): 1196.4,840.59 1216.46,820.53 1216.46,706.46 1192.14,682.14 1049,682.14 1049,767.36 1122.23,840.59
PVDD on Top Layer "NONET_L-01_P-001" (solid, pour order 36): 152.79,475.79 1058,475.79 1058,586 152.79,586
NetC21_2 on Top Layer "NONET_L-01_P-001" (solid, pour order 6): 2159,1341 2158.74,1340.74 1962.09,1340.74 1962.09,1183.26 2412.48,1183.26 2510,1280.78 2510,1445 2388,1445 2284,1341
OUT_B+ on Top Layer "NONET_L-01_P-001" (solid, pour order 21): 1130.85,1129.96 1130.85,1147.68 1205.68,1147.68 1231,1173 1231,1258.14 1294.17,1321.31 1294.17,1738.31 1395,1839.14 1694.4,1839.14 1727.88,1805.66 1727.88,1647.02 1713,1632.14 1500,1632.14 1383,1515.14 1383,1214.15 1377.26,1208.41 1310.73,1208.41 1260,1157.67 1232.29,1129.96
GND on Top Layer "NONET_L-01_P-001" (solid, pour order 22): 1130.85,942.95 1130.85,899.65 1244.5,899.65 1300.53,843.62 1363.59,843.62 1396.58,810.63 1396.58,529.56 1538.14,388 2202,388 2202,612 1475.14,612 1466,621.14 1466,797.46 1387.73,875.73 1312.01,875.73 1244.78,942.95 1196.79,942.95
GND on Top Layer "NONET_L-01_P-001" (solid, pour order 19): 1130.85,1053.19 1130.85,1096.5 1244.5,1096.5 1300.53,1152.52 1363.59,1152.52 1396.58,1185.52 1396.58,1466.58 1538.14,1608.14 2202,1608.14 2202,1384.14 1475.14,1384.14 1466,1375 1466,1198.68 1387.73,1120.42 1312.01,1120.42 1244.78,1053.19 1196.79,1053.19
OUT_A+ on Top Layer "NONET_L-01_P-001" (solid, pour order 13): 1130.85,866.18 1130.85,848.46 1202.83,848.46 1231,820.3 1231,738 1294.17,674.83 1294.17,257.83 1395,157 1694.4,157 1727.88,190.48 1727.88,349.12 1713,364 1500,364 1383,481 1383,780 1375.17,787.83 1309.89,787.83 1231.54,866.18
OUT_A- on Top Layer "NONET_L-01_P-001" (solid, pour order 17): 1130.85,950.83 1130.85,968.54 1279.47,968.54 1307.8,940.22 1599.55,940.22 1688.62,851.14 1727.88,811.88 1727.88,653.02 1708.86,634 1543.14,634 1507,670.14 1507,775.09 1399.18,882.91 1316.71,882.91 1248.79,950.83
NetC1_2 on Top Layer "NONET_L-01_P-001" (solid, pour order 7): 2159,348 2158.74,347.74 1965.1,347.74 1965.1,190.26 2412.48,190.26 2510,287.78 2510,452 2388,452 2284,348
NetC11_2 on Top Layer "NONET_L-01_P-001" (solid, pour order 5): 2159,1645 2158.74,1645.26 1965.1,1645.26 1965.1,1804.02 2411.2,1804.02 2510,1705.22 2510,1541 2388,1541 2284,1645
NetC10_2 on Top Layer "NONET_L-01_P-001" (solid, pour order 4): 2159,652 2158.74,652.26 1965.1,652.26 1965.1,809.74 2412.48,809.74 2510,712.22 2510,548 2388,548 2284,652

## Other copper
Top Layer:
  rectangle net DVDD: 716.5,772 784.5,789.5
  rectangle net ADR: 500.5,862.5 565.5,880.5
  rectangle net BST_A-: 1130.85,976.42 1196.79,994.13

## Silkscreen, mask and mechanical layers (free items; w line width, h text height)
Top Overlay:
  text "SDA" at 15.46,1639 h25
  text "_" at 2653.69,1621.51 h150
  text "SCL" at 15.46,1538.79 h25
  text "R" at 2654.69,1460.17 h150
  text "PDN" at 15.46,1438.58 h25
  text "+" at 2653.69,1348.45 h150
  text "GPIO2" at 15.46,1338.37 h25
  text "GPIO1" at 15.46,1238.16 h25
  text "GPIO0" at 15.46,1137.96 h25
  text "SDIN" at 15.46,1037.75 h25
  text "BCLK" at 15.46,937.54 h25
  text "LRCLK" at 15.46,837.33 h25
  text "DVDD" at 15.46,737.12 h25
  text "+" at 325.62,656.75 h100
  text "_" at 2656.69,628.51 h150
  text "L" at 2667.69,470.67 h150
  text "+" at 2656.69,345.45 h150
  text "_" at 368.99,230.87 h100 r90
Fabrication:
  drawing of 191 lines, arcs and shapes, not listed
  text "Layer" at 61.21,3270.68 h58.71
  text "Name" at 462.74,3270.68 h58.71
  text "Material" at 1372.92,3270.68 h58.71
  text "Thickness" at 2214.64,3270.68 h58.71
  text "Constant" at 2850.93,3270.68 h58.71
  text "Board Layer Stack" at 3408.97,3270.68 h58.71
  text "Top Overlay" at 462.74,3153.26 h58.71
  text "Top Solder" at 462.74,3035.84 h58.71
  text "Solder Resist" at 1372.92,3035.84 h58.71
  text "0.076mm" at 2273.33,3035.84 h58.71
  text "3.5" at 2850.93,3035.84 h58.71
  text "1" at 61.21,2918.42 h58.71
  text "Top Layer" at 462.74,2918.42 h58.71
  text "0.254mm" at 2273.33,2918.42 h58.71
  text "Dielectric 1" at 462.74,2801 h58.71
  text "FR-4" at 1372.92,2801 h58.71
  text "0.940mm" at 2273.33,2801 h58.71
  text "4.6" at 2850.93,2801 h58.71
  text "2" at 61.21,2683.58 h58.71
  text "Bottom Layer" at 462.74,2683.58 h58.71
  text "0.254mm" at 2273.33,2683.58 h58.71
  text "Bottom Solder" at 462.74,2566.16 h58.71
  text "Solder Resist" at 1372.92,2566.16 h58.71
  text "0.076mm" at 2273.33,2566.16 h58.71
  text "3.5" at 2850.93,2566.16 h58.71
  text "Bottom Overlay" at 462.74,2448.74 h58.71
  text "Total board thickness:" at 61.21,2331.32 h58.71
  text "1.600mm" at 2278.22,2331.32 h58.71
Drill Drawing:
  circle w10: c3325.62,405.83 r33.33
  lines w10: 3292.29,289.17 3358.96,289.17 3325.62,222.5 3292.29,289.17 ; 3292.29,522.5 3358.96,522.5 3358.96,589.17 3292.29,589.17 3292.29,522.5
  lines w15: 3232.5,177.5 13773.58,177.5 ; 3232.5,627.5 13773.58,627.5 ; 3783.38,27.5 3783.38,777.5 ; 4383.22,27.5 4383.22,777.5 ; 5482.9,27.5 5482.9,777.5 ; 5988.77,27.5 5988.77,777.5 ; 6722.57,27.5 6722.57,777.5 ; 8222.13,27.5 8222.13,777.5 ; 8811.97,27.5 8811.97,777.5 ; 9557.77,27.5 9557.77,777.5 ; 10207.6,27.5 10207.6,777.5 ; 11061.36,27.5 11061.36,777.5 ; 12394.97,27.5 12394.97,777.5 ; 3232.5,27.5 13773.58,27.5 13773.58,777.5 3232.5,777.5 3232.5,27.5
  text "Symbol" at 3322.5,672.5 h72
  text "Count" at 3828.38,672.5 h72
  text "Hole Size" at 4428.22,672.5 h72
  text "Plated" at 5527.9,672.5 h72
  text "Hole Type" at 6033.77,672.5 h72
  text "Drill Layer Pair" at 6767.57,672.5 h72
  text "Via/Pad" at 8267.13,672.5 h72
  text "Pad Shape" at 8856.97,672.5 h72
  text "Template" at 9602.77,672.5 h72
  text "Description" at 10252.6,672.5 h72
  text "Hole Tolerance (+)" at 11106.36,672.5 h72
  text "Hole Tolerance (-)" at 12439.97,672.5 h72
  text "6" at 3828.38,522.5 h60
  text "1.300mm (51.18mil)" at 4428.22,522.5 h60
  text "PTH" at 5527.9,522.5 h60
  text "Round" at 6033.77,522.5 h60
  text "Top Layer - Bottom Layer" at 6767.57,522.5 h60
  text "Pad" at 8267.13,522.5 h60
  text "Rounded" at 8856.97,522.5 h60
  text "(Mixed)" at 9602.77,522.5 h60
  text "10" at 3828.38,372.5 h60
  text "0.900mm (35.43mil)" at 4428.22,372.5 h60
  text "PTH" at 5527.9,372.5 h60
  text "Round" at 6033.77,372.5 h60
  text "Top Layer - Bottom Layer" at 6767.57,372.5 h60
  text "Pad" at 8267.13,372.5 h60
  text "(Mixed)" at 8856.97,372.5 h60
  text "(Mixed)" at 9602.77,372.5 h60
  text "258" at 3828.38,222.5 h60
  text "0.300mm (11.81mil)" at 4428.22,222.5 h60
  text "PTH" at 5527.9,222.5 h60
  text "Round" at 6033.77,222.5 h60
  text "Top Layer - Bottom Layer" at 6767.57,222.5 h60
  text "Via" at 8267.13,222.5 h60
  text "Rounded" at 8856.97,222.5 h60
  text "v60h30m60" at 9602.77,222.5 h60
  text "274 Total" at 3828.38,72.5 h60
Board Outline:
  circle w10: c2615.63,1828.14 r68.9
  circle w10: c2618.56,137.44 r68.9
  circle w10: c139.19,1829.31 r68.9
  circle w10: c139.2,139.2 r68.9
  lines w10: 860.55,0 910,0 ; 2756,44 cw(c2712,44) 2712,0 2546,0 50,0 cw(c50,50) 0,50 0,1918.5 cw(c50,1918.5) 50,1968.5 2328.35,1968.5 2546,1968.5 2702,1968.5 cw(c2702,1914.5) 2756,1914.5 2756,46

## Dimensions
139.19,1968.51 to 2615.63,1967.33 on Dimension
0,139.2 to 0,1829.31 on Dimension
2712,0 to 2702,1968.5 on Dimension
0,50 to 2756,46 on Dimension